# EAGLE board final_board (EAGLE 7.5.0)
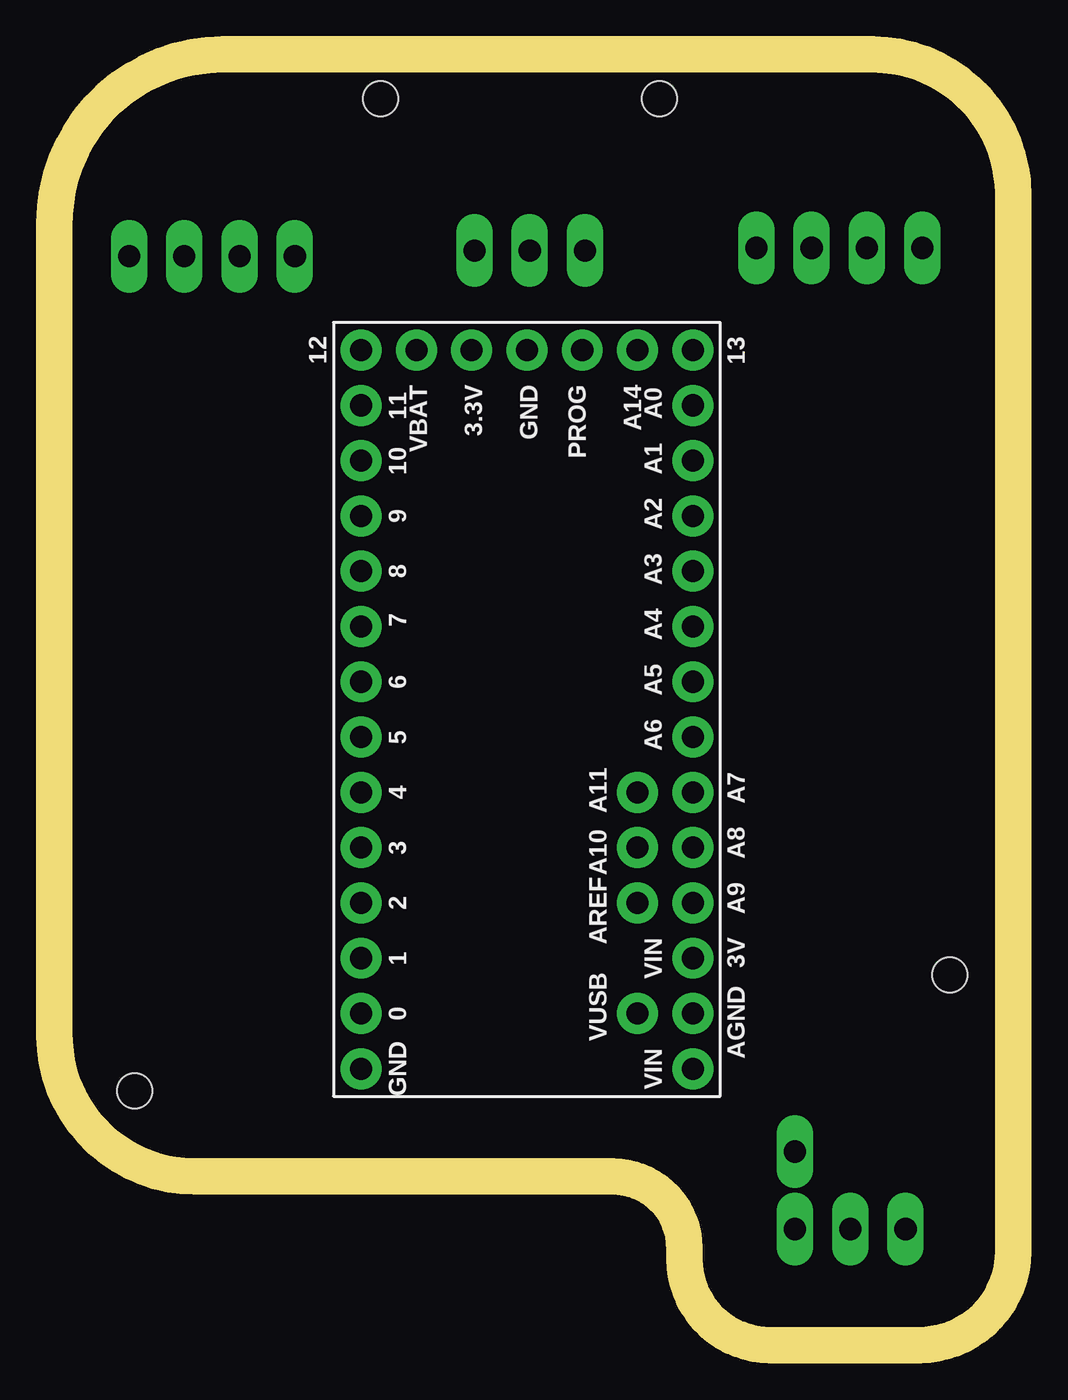
[diagram p0: board, top side]
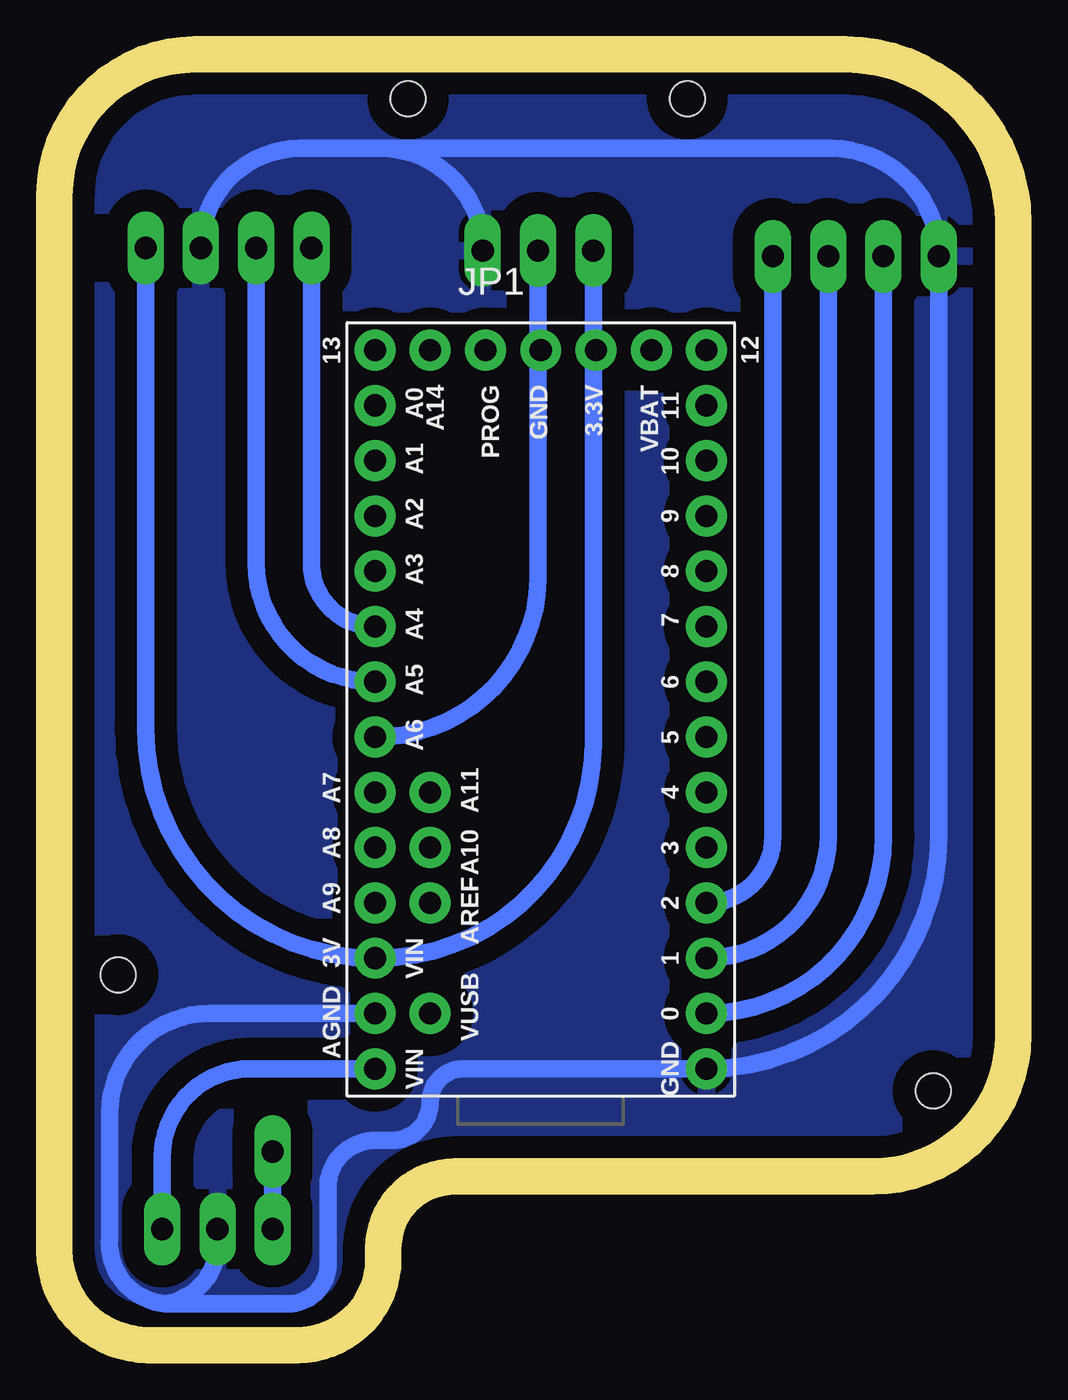
[diagram p1: board, bottom side, seen from below]

Size 44.07 x 59.31 mm. Coordinates in mm from the lower left corner, seen from the top.
Outline: 19.18,59.31 23.11,59.31 37.59,59.31 arc-90 44.07,52.83 44.07,4.32 arc-90 39.75,0 32.89,0 arc-90 28.96,3.94 28.96,4.45 arc90 25.65,7.75 6.48,7.75 arc-90 0,14.22 0,51.56 arc-90 7.75,59.31 19.18,59.31
Copper layers (1*16): Top 0.035mm / dielectric 1.5mm / Bottom 0.035mm
Design rules "default": minimum track width 10mil, minimum drill 24mil, track to track 8mil, track to pad 8mil, pad to pad 8mil, via to via 8mil, smd to smd 8mil, copper to edge 40mil, drill to drill 8mil, minimum pad ring 10mil, minimum via ring 8mil, stop-mask expansion 4mil, vias tented up to drill 0mil, thermal gap 10mil
Holes 1.6 mm at 14.99,57.28 27.81,57.28 41.15,17.02 3.68,11.68

## Footprints (pad centres in the part's own frame; a part is rotated, then mirrored left to right if it is on the bottom)
TEENSY-3.1 = drill 1.016 pad 1.88: 0 16.51,3.81; 1 16.51,6.35; 2 16.51,8.89; 3 16.51,11.43; 3.3V 11.43,34.29; 3V 1.27,6.35; 4 16.51,13.97; 5 16.51,16.51; 6 16.51,19.05; 7 16.51,21.59; 8 16.51,24.13; 9 16.51,26.67; 10 16.51,29.21; 11 16.51,31.75; 12 16.51,34.29; 13 1.27,34.29; 14 1.27,31.75; 15 1.27,29.21; 16 1.27,26.67; 17 1.27,24.13; 18 1.27,21.59; 19 1.27,19.05; 20 1.27,16.51; 21 1.27,13.97; 22 1.27,11.43; 23 1.27,8.89; A10 3.81,11.43; A11 3.81,13.97; A14/DAC 3.81,34.29; AGND 1.27,3.81; AREF 3.81,8.89; GND 8.89,34.29; GND1 16.51,1.27; PROG 6.35,34.29; VBAT 13.97,34.29; VIN 1.27,1.27; VUSB 3.81,3.81
HEADER-3 = drill 1.016 pad 1.676 long: 1 0,0; 2 0,2.54; 3 0,5.08
HEADER-1 = drill 1.016 pad 1.676 long: 1 0,0
HEADER-4 = drill 1.016 pad 1.676 long: 1 0,0; 2 0,2.54; 3 0,5.08; 4 0,7.62

## Placement (x,y rotation side)
JP1  TEENSY-3.1SILK  [TEENSY-3.1]  30.61,11.43 0 bottom
U$1  HEADER-3  [HEADER-3]  39.12,5.33 90 top
U$2  HEADER-3  [HEADER-3]  24.38,50.29 90 top
U$3  HEADER-1  [HEADER-1]  34.04,8.89 90 top
U$4  HEADER-4  [HEADER-4]  39.88,50.42 90 top
U$5  HEADER-4  [HEADER-4]  11.05,50.04 90 top

## Library data of the parts
JP1 = SparkFun-Boards; SF_ID: DEV-12646
U$1-U$5 = homemade-hardware

## Nets
5V: U$1.3 U$3.1
GND: JP1.AGND JP1.GND1 U$1.2 U$2.1 U$4.2 U$5.4
N$1: JP1.1 U$5.2
N$2: JP1.0 U$5.3
N$4: JP1.2 U$5.1
NEO: JP1.20 U$2.2
SCL: JP1.19 U$4.3
SDA: JP1.18 U$4.4
VCC: JP1.3V U$2.3 U$4.1
VIN: JP1.VIN U$1.1

## Tracks (layer width: path | path; a pad name or v marks a point on that pad's centre or on a via)
5V
  Bottom 0.813: U$3.1 U$1.3
GND
  Bottom 0.813: 29.08,54.99 8.38,54.99 arc90 U$5.4 3.43,23.37 arc90 JP1.GND1 25.27,12.7 arc-90 26.8,11.18 arc90 28.58,9.4 29.46,9.4 arc-90 31.5,7.11 31.5,3.94 arc90 33.15,1.9 38.99,1.9 | U$4.2 arc90 32.77,54.99 29.08,54.99 | U$2.1 arc-90 29.08,54.99 | U$1.2 36.58,5.08 arc90 38.99,1.9 | 38.99,1.9 arc90 41.53,4.95 41.53,10.67 arc90 36.96,15.24 JP1.AGND
  pour Bottom (isolate 1.016): -6.1,62.61 46.74,62.61 46.74,-3.56 -6.1,-3.56
N$1
  Bottom 0.813: JP1.1 arc-90 8.51,23.37 U$5.2
N$2
  Bottom 0.813: JP1.0 arc-90 5.97,23.37 U$5.3
N$3  (via drill 1 pad 1.68)
  other vias: 3.68,11.68
N$4
  Bottom 0.813: JP1.2 arc-90 11.05,23.37 U$5.1
N$5  (via drill 1 pad 1.68)
  other vias: 41.15,17.02
N$7  (via drill 1 pad 1.68)
  other vias: 14.99,57.28
N$8  (via drill 1 pad 1.68)
  other vias: 27.81,57.28
NEO
  Bottom 0.813: U$2.2 21.84,35.18 arc90 JP1.20
SCL
  Bottom 0.813: U$4.3 34.8,35.94 arc-90 JP1.19
SDA
  Bottom 0.813: U$4.4 32.26,35.94 arc-90 JP1.18
VCC
  Bottom 0.813: U$4.1 39.88,28.32 arc-90 JP1.3V arc-90 19.3,27.56 U$2.3
VIN
  Bottom 0.813: JP1.VIN 35.05,12.7 arc-90 39.12,8.64 U$1.1